# EAGLE board Output Mixer PANEL v1 (EAGLE 7.7.0)
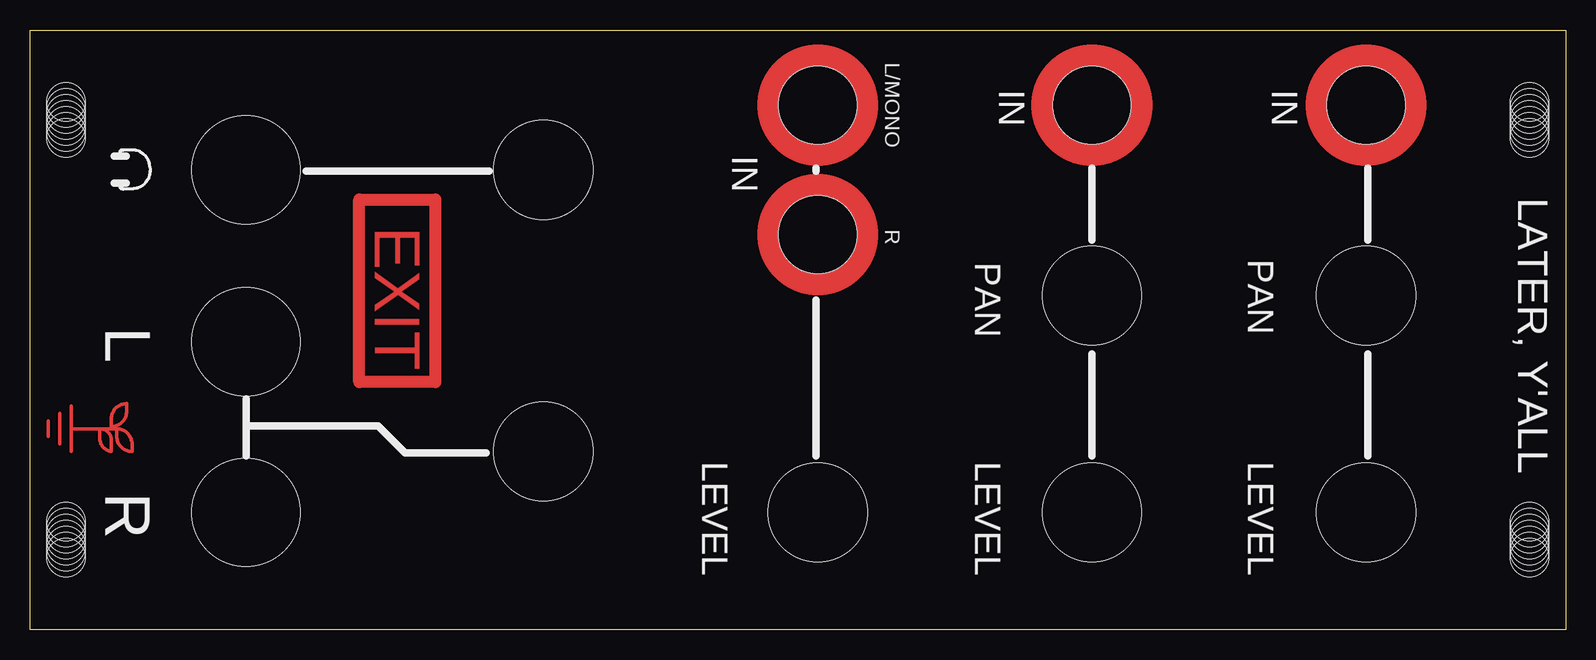
[diagram p0: board, top side]
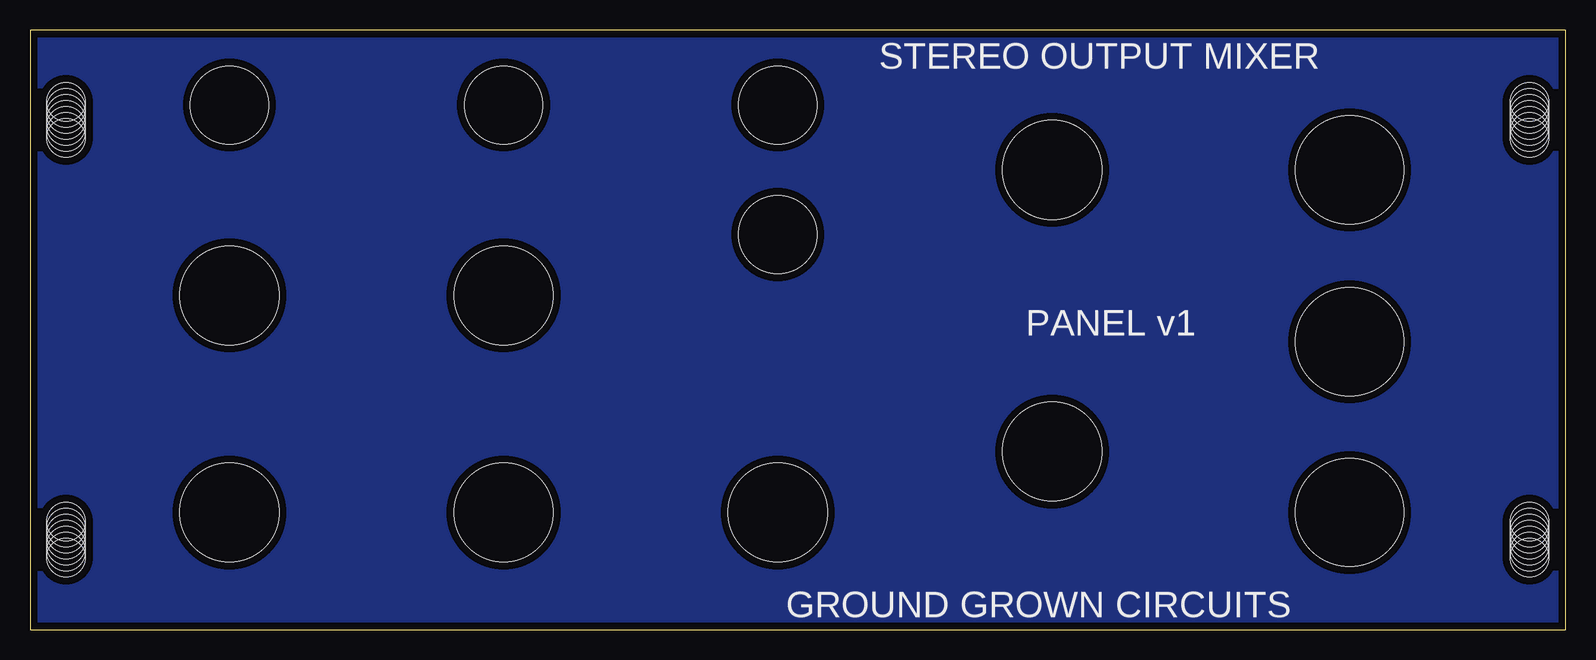
[diagram p1: board, bottom side, seen from below]

Size 128 x 50 mm. Coordinates in mm from the lower left corner, seen from the top.
Outline: 0,0 0,50 128,50 128,0 0,0
Copper layers (1*16): Top 0.035mm / dielectric 1.5mm / Bottom 0.035mm
Design rules "SparkFun": minimum track width 8mil, minimum drill 20mil, track to track 8mil, track to pad 8mil, pad to pad 8mil, via to via 8mil, smd to smd 8mil, copper to edge 8mil, drill to drill 8mil, minimum pad ring 12mil, minimum via ring 10mil, stop-mask expansion 4mil, vias tented up to drill 20mil, thermal gap 10mil
Holes 9 mm at 18,24 18,9.77 18,38.34

## Footprints (pad centres in the part's own frame; a part is rotated, then mirrored left to right if it is on the bottom)
JACK_DRILL_COPPER_SM = hole 6.5: 0,0
POT_DRILL = hole 8.25: 0,0
MOUNT_DRILL = hole 3.2: 3,9; 3,8.5; 3,8; 3,7.5; 3,7; 3,6.5; 3,6

## Placement (x,y rotation side)
E$1  [JACK_DRILL_COPPER_SM]  65.66,32.94 0 top
E$2  [JACK_DRILL_COPPER_SM]  65.66,43.74 0 top
E$3  [JACK_DRILL_COPPER_SM]  88.52,43.74 0 top
E$4  [JACK_DRILL_COPPER_SM]  111.38,43.74 0 top
E$5  [POT_DRILL]  88.52,27.86 0 top
E$6  [POT_DRILL]  88.52,9.77 0 top
E$7  [POT_DRILL]  111.38,27.86 0 top
E$8  [POT_DRILL]  111.38,9.77 0 top
E$9  [POT_DRILL]  65.66,9.77 0 top
E$10  [POT_DRILL]  42.8,14.85 0 top
E$11  [POT_DRILL]  42.8,38.34 0 top
E$12  [MOUNT_DRILL]  0,0 0 top
E$13  [MOUNT_DRILL]  128,50 180 top
E$14  [MOUNT_DRILL]  0,50 180 bottom
E$15  [MOUNT_DRILL]  128,0 0 bottom
E$16  [LOGO_SMALL_COPPER]  3.5,16.75 270 top
E$17  [EXIT_SIGN]  31.25,28.25 270 top

## Library data of the parts
E$1-E$17 = GroundGrownCircuits

## Tracks (layer width: path | path; a pad name or v marks a point on that pad's centre or on a via)
S$1
  pour Bottom (isolate 0.61): 0,0 0,50 128,50 128,0

## Text on the board
tPlace: L/MONO | IN | IN | IN | R | PAN | PAN | L | LATER, Y'ALL | R | LEVEL | LEVEL | LEVEL
bPlace: STEREO OUTPUT MIXER | PANEL v1 | GROUND GROWN CIRCUITS